# Altium PCB Synthesizer.PcbDoc (part 1 of 2)
Units mm, origin at the board's own origin, x right, y up, seen from the top; angles counter-clockwise.
Board outline 62.91 x 80 mm, 4 copper layers (Top, GND, Power, Bottom), stack 1.782 mm thick; 89 components, 58 nets, 323 pads, 295 vias.
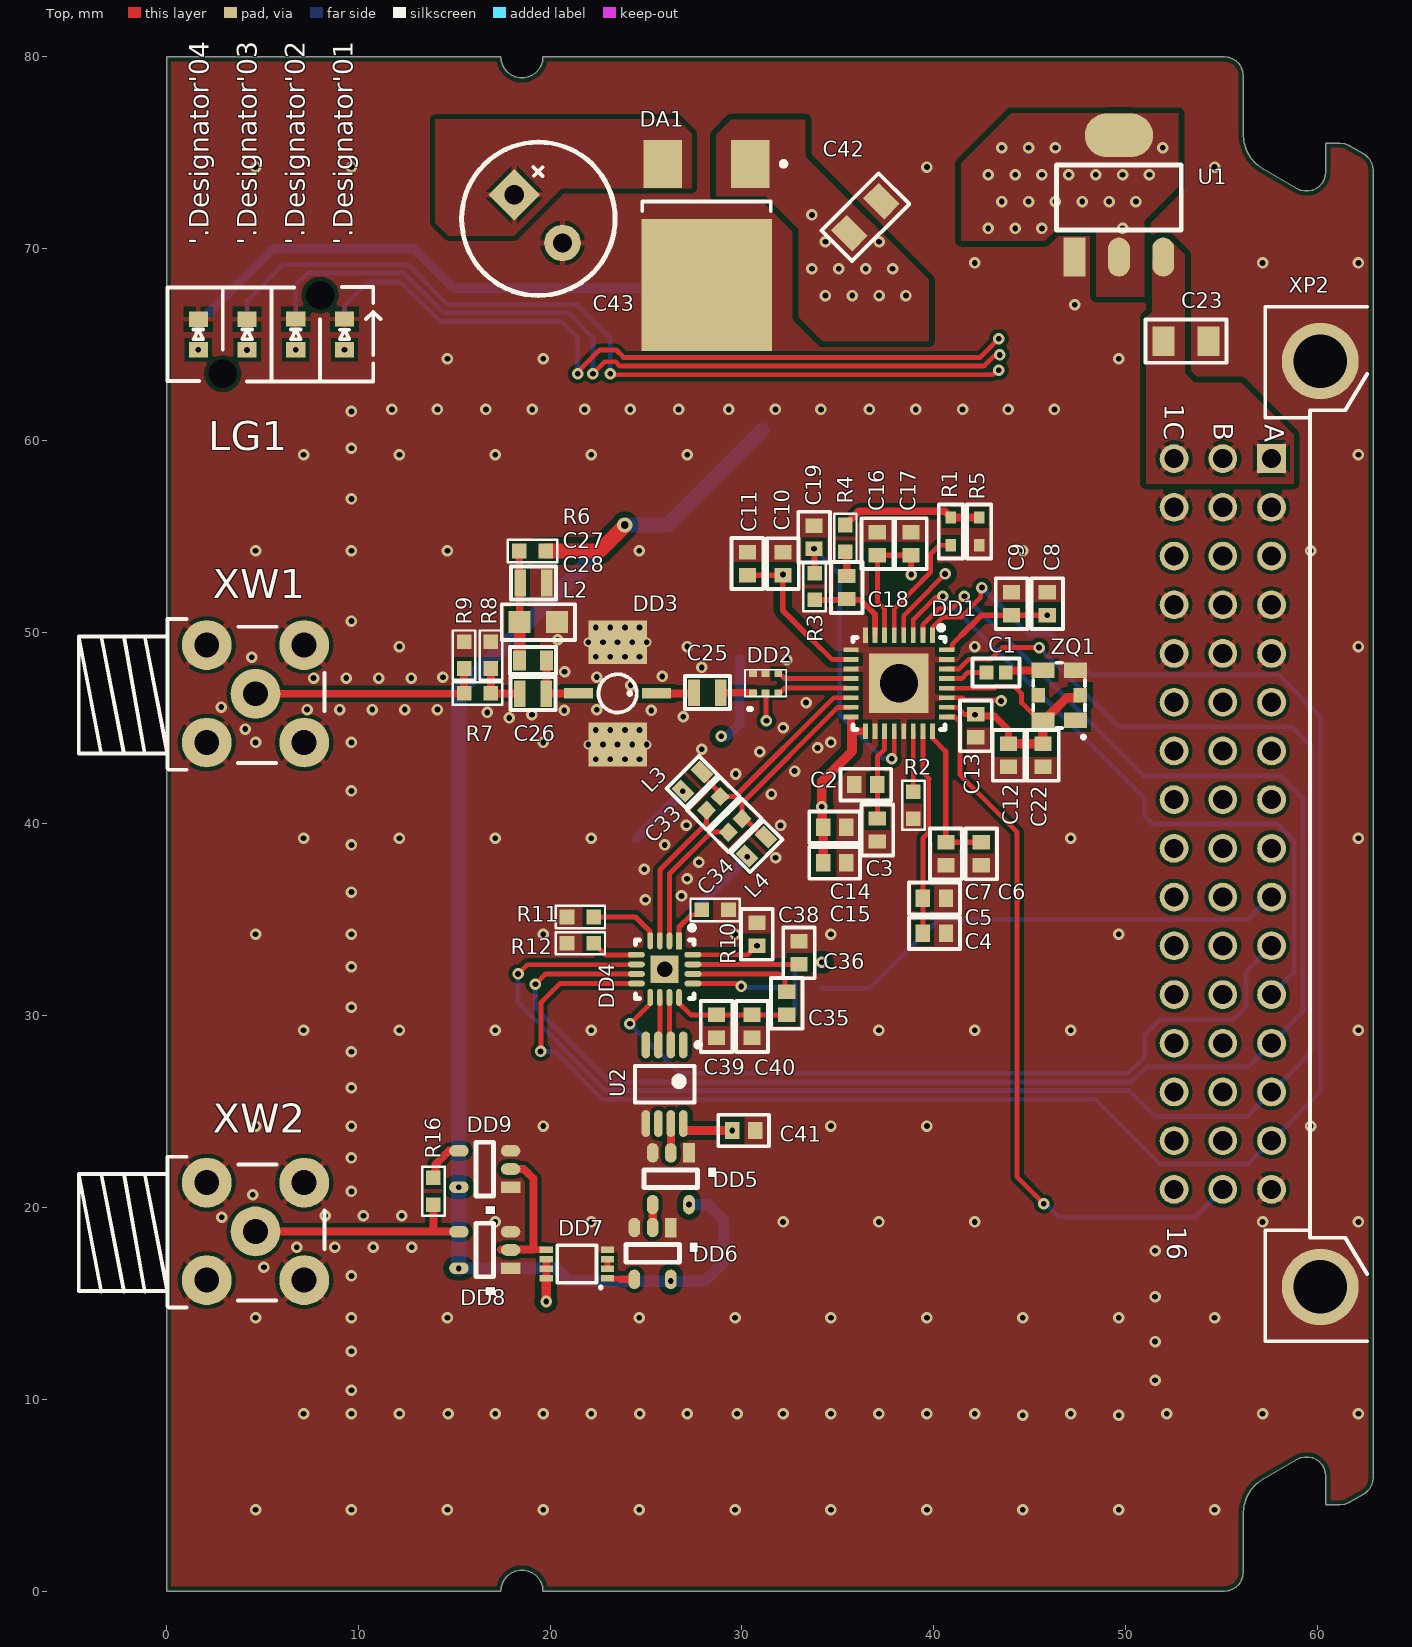
[diagram p0: Top view]
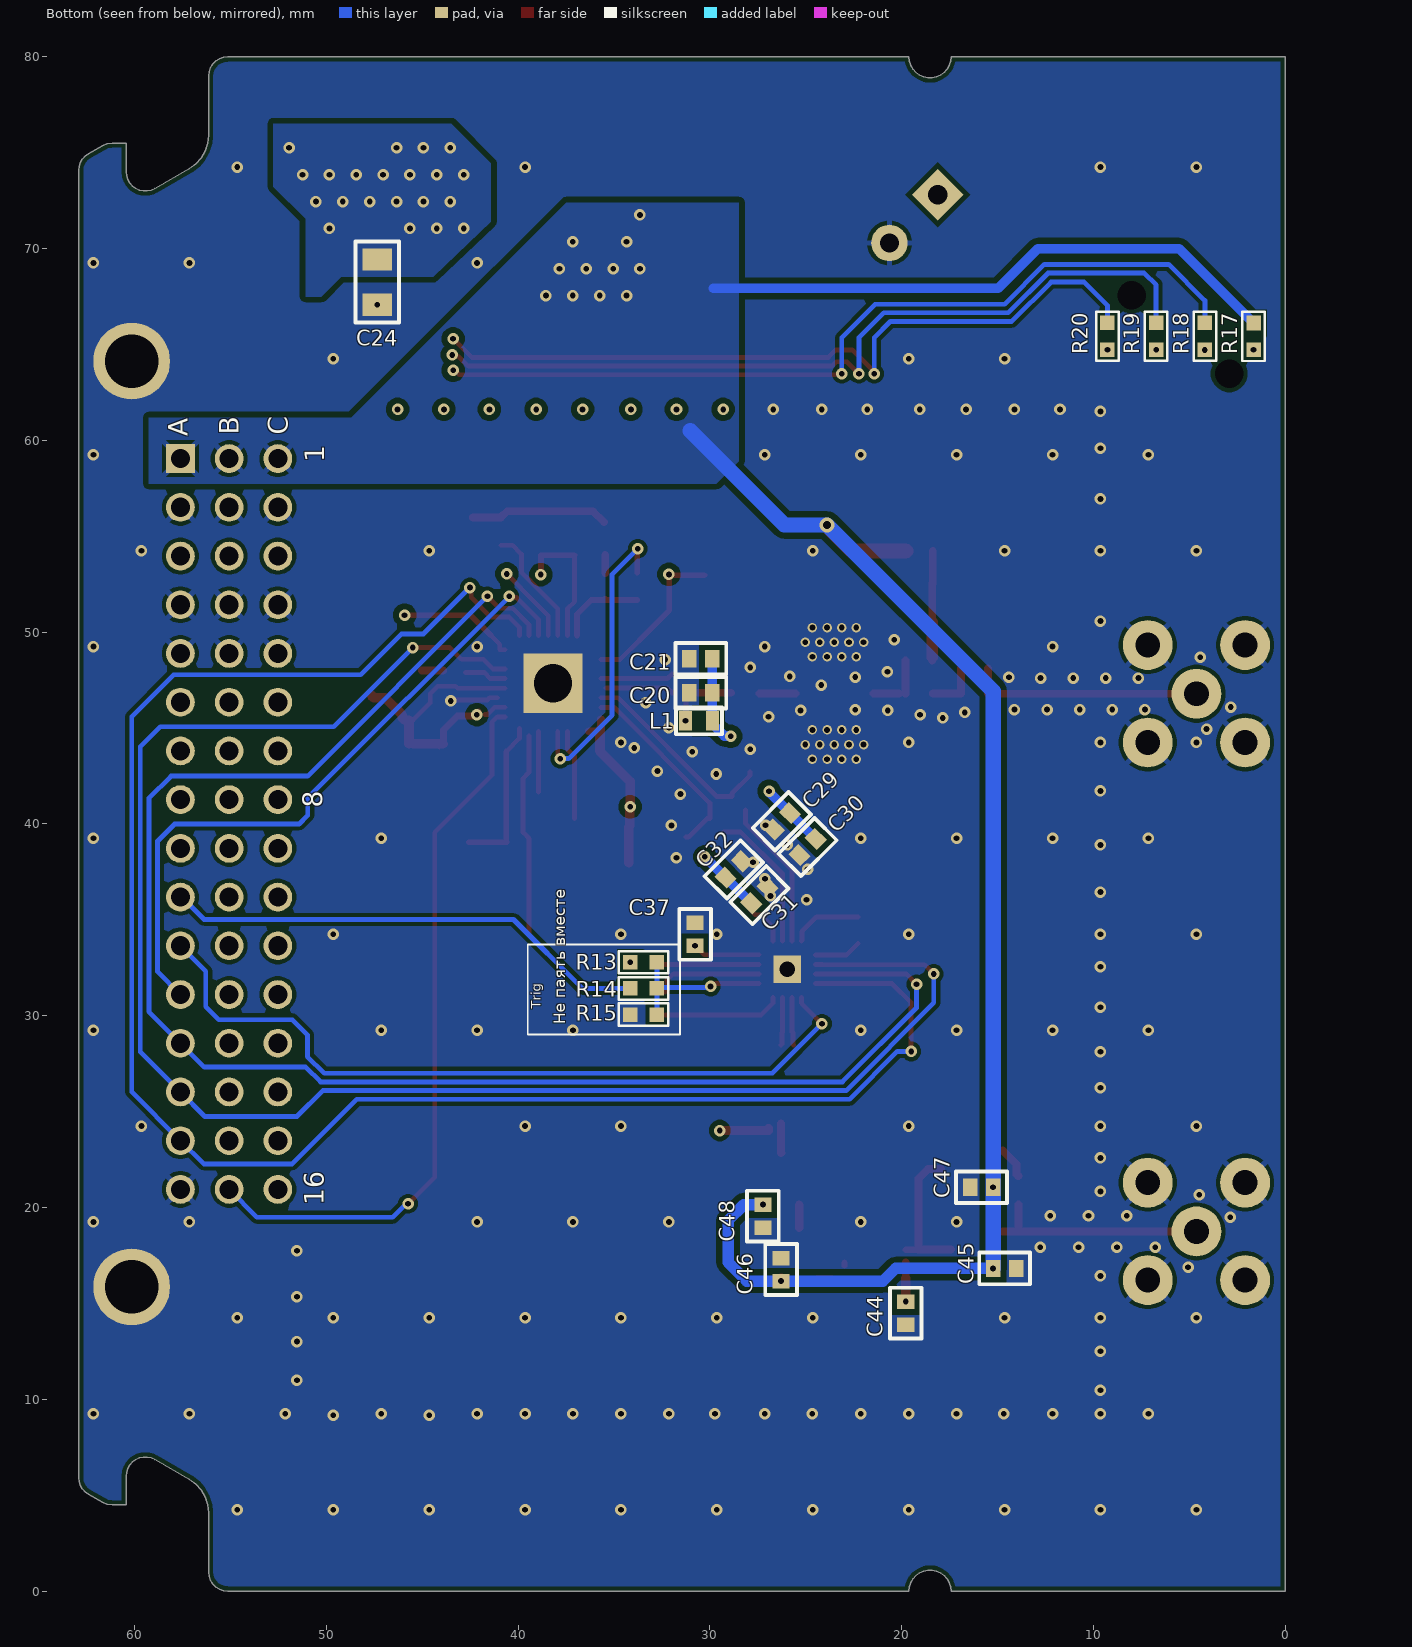
[diagram p1: Bottom view, seen from below]
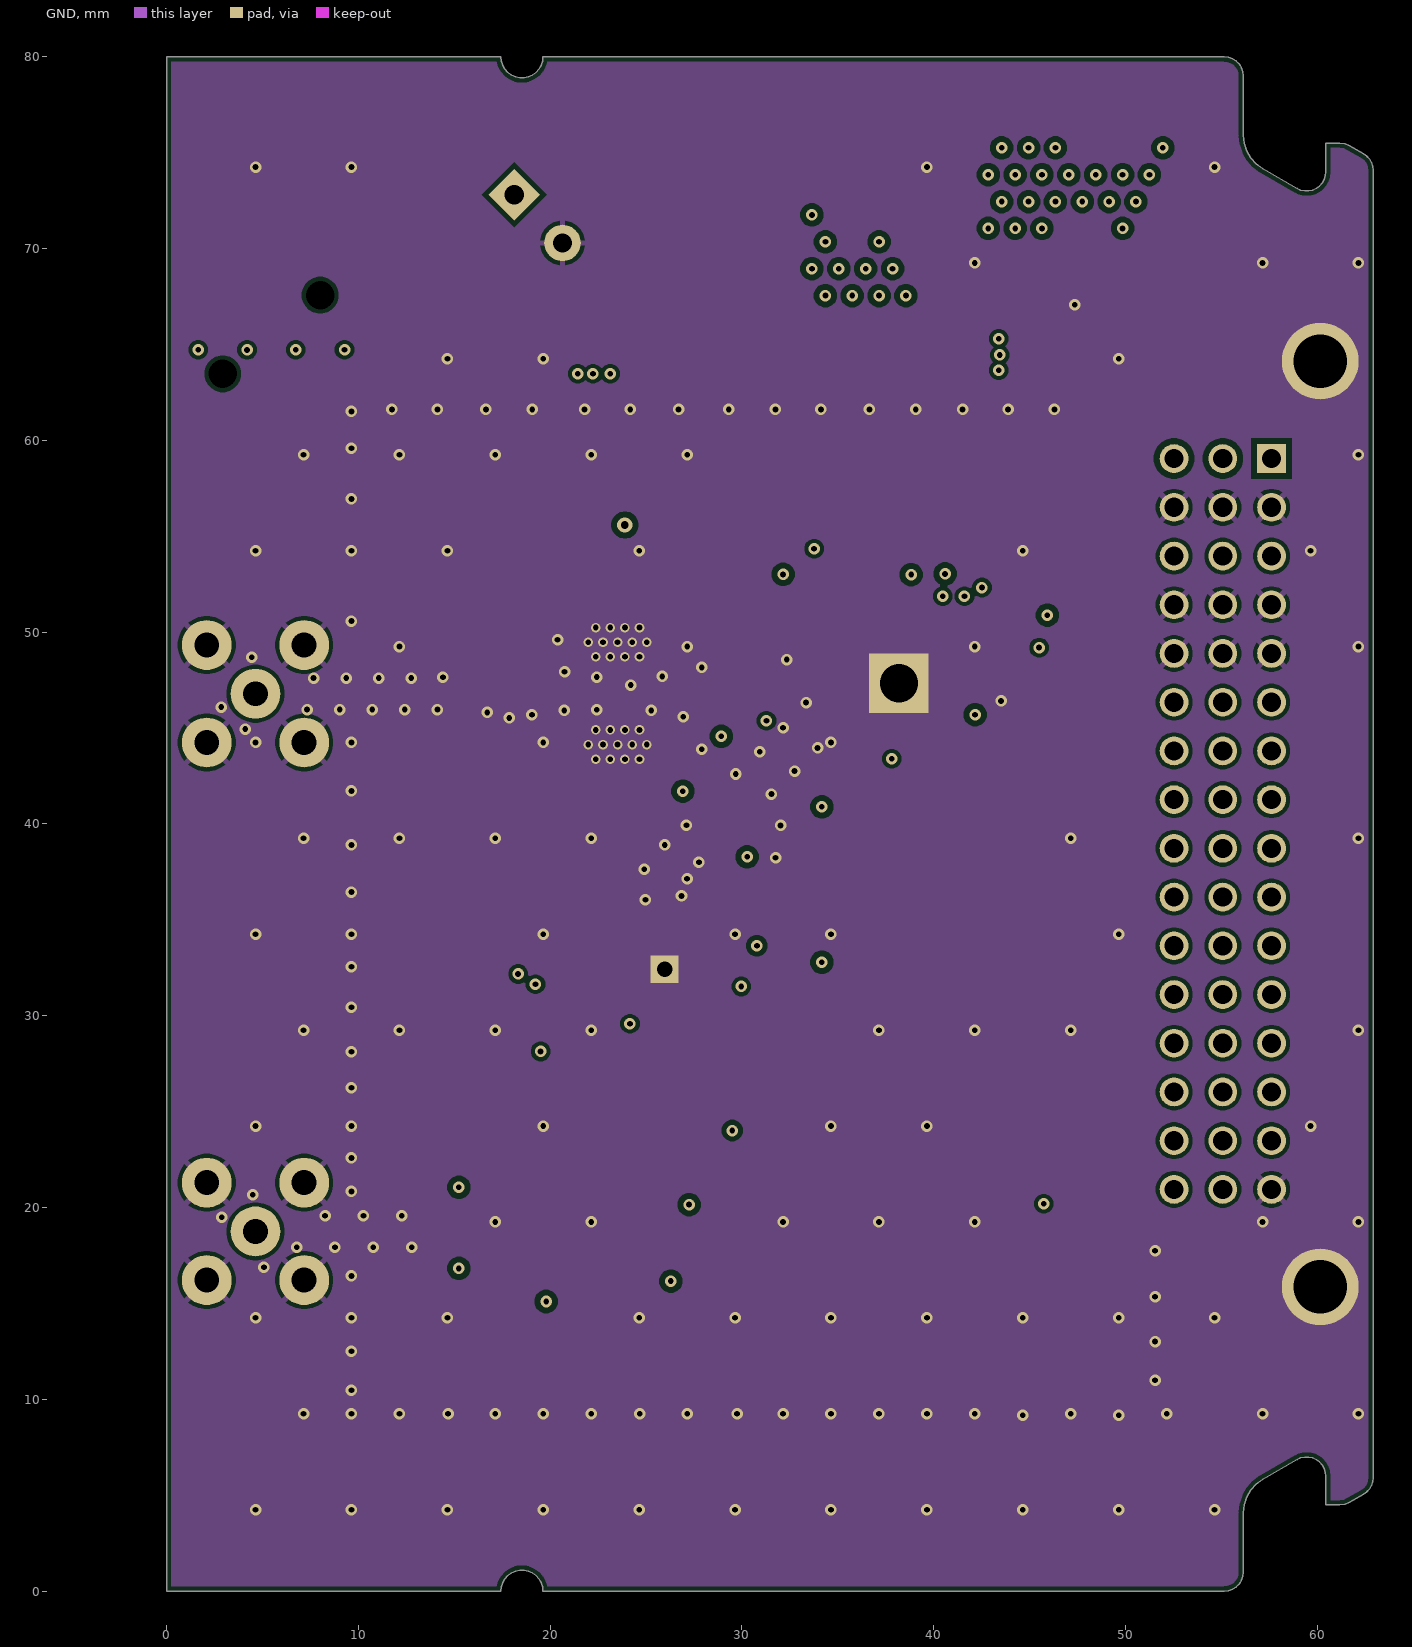
[diagram p2: GND]
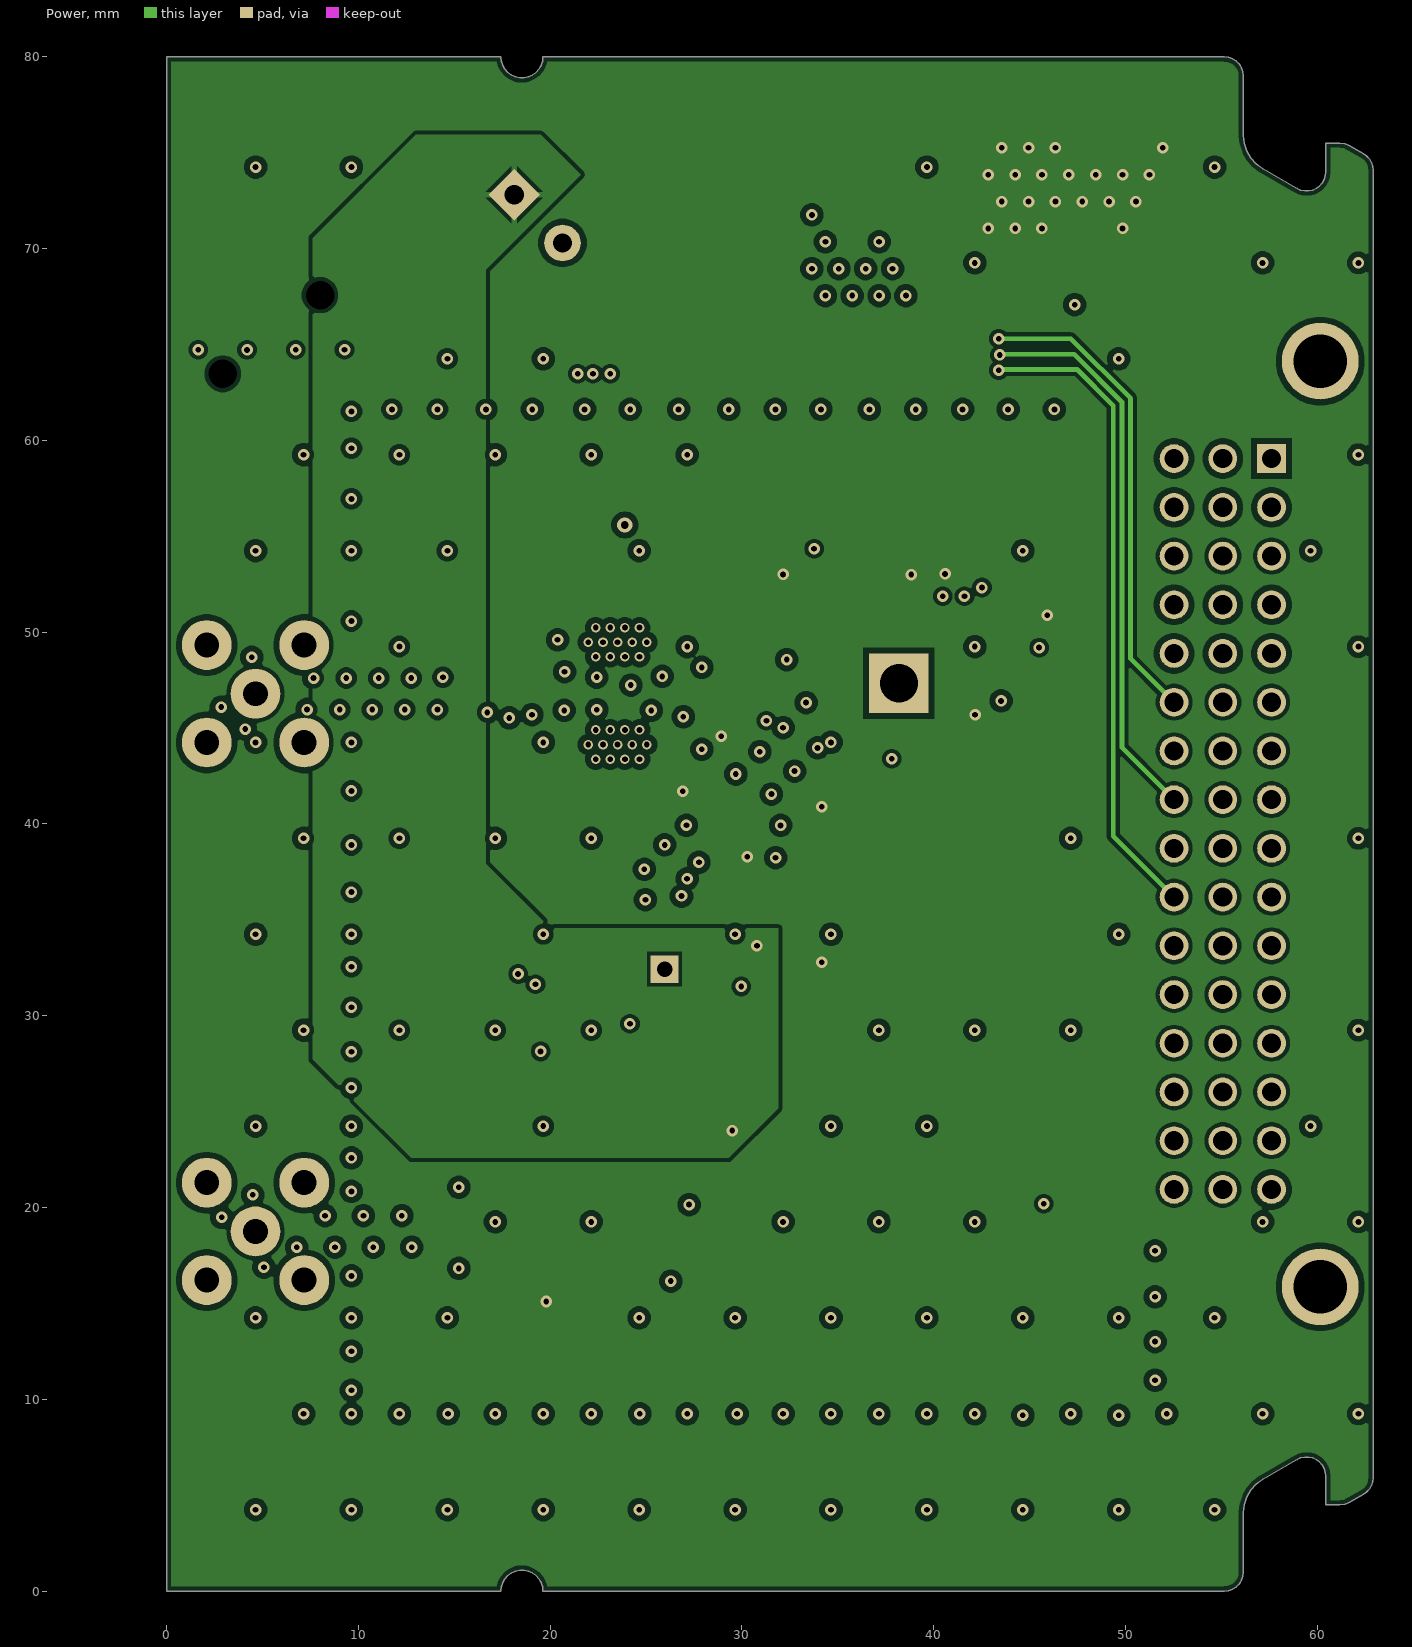
[diagram p3: Power]

## Layer stack, top to bottom
Top Solder: solder mask 0.0102, Solder Resist, Dk 3.5
Top: signal copper 0.035
Dielectric 1: prepreg 0.0711, PP-006, Dk 4.1
GND: signal copper 0.035
Dielectric1: core 1.5, FR-4, Dk 4.8
Power: signal copper 0.035
Dielectric 2: prepreg 0.0711, PP-006, Dk 4.1
Bottom: signal copper 0.035
Bottom Solder: solder mask 0.0102, Solder Resist, Dk 3.5

## Board outline
0,0 17.425,0 17.449,0.229 17.52,0.447 17.635,0.647 17.789,0.817 17.975,0.953 18.185,1.046 18.41,1.094 18.64,1.094 18.865,1.046 19.075,0.953 19.261,0.817 19.415,0.647 19.53,0.447 19.601,0.229 19.625,0 55.139,0 55.361,0.025 55.573,0.099 55.762,0.218 55.921,0.376 56.04,0.566 56.114,0.777 56.139,1 56.139,4.096 56.182,4.512 56.312,4.909 56.521,5.271 56.8,5.582 57.139,5.828 58.937,6.866 59.128,6.951 59.332,6.995 59.541,6.995 59.746,6.951 59.937,6.866 60.106,6.743 60.246,6.588 60.35,6.407 60.415,6.208 60.437,6 60.437,4.5 61.169,4.5 61.428,4.534 61.669,4.634 62.407,5.06 62.576,5.183 62.716,5.338 62.82,5.519 62.885,5.718 62.907,5.926 62.907,74.074 62.885,74.282 62.82,74.481 62.716,74.662 62.576,74.817 62.407,74.94 61.669,75.366 61.428,75.466 61.169,75.5 60.437,75.5 60.437,74 60.415,73.792 60.35,73.593 60.246,73.412 60.106,73.257 59.937,73.134 59.746,73.049 59.541,73.005 59.332,73.005 59.128,73.049 58.937,73.134 57.139,74.172 56.8,74.418 56.521,74.729 56.312,75.091 56.182,75.488 56.139,75.904 56.139,79 56.114,79.223 56.04,79.434 55.921,79.624 55.762,79.782 55.573,79.901 55.361,79.975 55.139,80 19.625,80 19.601,79.771 19.53,79.553 19.415,79.353 19.261,79.183 19.075,79.047 18.865,78.954 18.64,78.906 18.41,78.906 18.185,78.954 17.975,79.047 17.789,79.183 17.635,79.353 17.52,79.553 17.449,79.771 17.425,80 0,80

## Design rules (kind name [scope] priority, off if disabled: settings)
AcuteAngle [All] p1: minimum=3.50000000000000E+0001 checktracksonly=FALSE
BoardOutlineClearance "BoardOutlineClearance 1" [All] p1: gap=0.25 ignorepadtopadclearanceinfootprint=FALSE except(0: Arc-SplitContinuation Track-SplitContinuation SMDPad-SplitContinuation THPad-SplitContinuation Via-SplitContinuation Fill-SplitContinuation Poly-SplitContinuation Region-SplitContinuation Text-SplitContinuation) // Milling
BoardOutlineClearance "BoardOutlineClearance 2" [All] p2: gap=0.4 ignorepadtopadclearanceinfootprint=FALSE except(0: Arc-SplitContinuation Track-SplitContinuation SMDPad-SplitContinuation THPad-SplitContinuation Via-SplitContinuation Fill-SplitContinuation Poly-SplitContinuation Region-SplitContinuation Text-SplitContinuation) // V-Cut
Clearance [(InNamedUnion('Unions') AND InNet('+3.3V')) vs (InNamedUnion('Unions') AND InNet('GND'))] p1: gap=0.2 ignorepadtopadclearanceinfootprint=TRUE
Clearance Clearance_HMC988LP3E [InComponent('DD4')Or InComponent('DD7')] p2: gap=0.17 ignorepadtopadclearanceinfootprint=TRUE
Clearance "Clearance GND and 33v in DD1" [InNet('+3.3V') AND OnLayer('Top') And InComponent('DD1') vs (InNamedPolygon('Top-GND')or InNet('GND'))  AND OnLayer('Top')] p3: gap=0.2 ignorepadtopadclearanceinfootprint=TRUE
Clearance Clearance_3_3V [InNet('+3.3V') vs InNet('GND')] p4: gap=0.3 ignorepadtopadclearanceinfootprint=TRUE except(0.2: Arc-SMDPad Track-SMDPad SMDPad-SMDPad)
Clearance Clearance_5V_1 [InNet('+5V') vs InNet('GND')] p5: gap=0.25 ignorepadtopadclearanceinfootprint=TRUE
Clearance Clearance_6V [InNet('+6V')] p6: gap=0.3 ignorepadtopadclearanceinfootprint=TRUE
Clearance "Clearance-1 1 Oz 35mkm" [All] p7 off: gap=0.2 ignorepadtopadclearanceinfootprint=TRUE // Standart
Clearance "Clearance-1 1/2 Oz 18mkm" [All] p8: gap=0.2 ignorepadtopadclearanceinfootprint=TRUE // Standart
DiffPairsRouting "DiffPairsRouting 1 Oz 35mkm" [All] p1 off: maxlimit=0.254 minlimit=0.23 mostfreqgap=0.23 toplayer_minwidth=0.26 toplayer_maxwidth=0.26 toplayer_prefwidth=0.26 midlayer1_minwidth=0.26 midlayer1_maxwidth=0.26 midlayer1_prefwidth=0.26 midlayer2_minwidth=0.26 midlayer2_maxwidth=0.26 midlayer2_prefwidth=0.26 bottomlayer_minwidth=0.26 bottomlayer_maxwidth=0.26 bottomlayer_prefwidth=0.26 maxuncoupledlength=12.7
DiffPairsRouting "DiffPairsRouting 1/2 Oz 18mkm" [All] p2: maxlimit=0.254 minlimit=0.125 mostfreqgap=0.254 toplayer_minwidth=0.125 toplayer_maxwidth=0.381 toplayer_prefwidth=0.381 midlayer1_minwidth=0.125 midlayer1_maxwidth=0.381 midlayer1_prefwidth=0.381 midlayer2_minwidth=0.125 midlayer2_maxwidth=0.381 midlayer2_prefwidth=0.381 bottomlayer_minwidth=0.125 bottomlayer_maxwidth=0.381 bottomlayer_prefwidth=0.381 maxuncoupledlength=12.7 // Standart
HoleSize "Minimum HoleSize" [IsPad] p1: absolutevalues=TRUE maxlimit=5.9 minlimit=0.6 maxpercent=80.000 minpercent=20.000
HoleSize "Minimum HoleSize VIA 1" [IsVia] p2: absolutevalues=TRUE maxlimit=5.9 minlimit=0.3 maxpercent=80.000 minpercent=20.000 // Standart
HoleSize "Minimum HoleSize VIA 2" [IsVia] p3 off: absolutevalues=TRUE maxlimit=5.9 minlimit=0.2 maxpercent=80.000 minpercent=20.000 // Advance
HoleToHoleClearance Hole2HoleClearance [All] p1: gap=0.25 allowstackedmicrovias=FALSE
MinimumAnnularRing "Minimum AR VIA Standart" [IsVia] p1: minimumring=0.15
MinimumAnnularRing "Minimum AR PAD Standart" [IsPAD] p2: minimumring=0.2
MinimumAnnularRing "Minimum AR VIA Advance" [IsVia] p3 off: minimumring=0.1
MinimumAnnularRing "Minimum AR PAD Advance" [IsPAD] p4 off: minimumring=0.15
MinimumSolderMaskSliver "SolderMask Bridge Standart" [All] p1: minsoldermaskwidth=0.14 // All Masks
MinimumSolderMaskSliver "SolderMask Bridge Advance" [All] p2 off: minsoldermaskwidth=0.1 // Mask LDI
PlaneClearance "PlaneClearance 1 Oz 35mkm" [All] p1 off: clearance=0.2
PlaneClearance "PlaneClearance-1 1/2 Oz 18mkm" [All] p2: clearance=0.2 // Standart
PlaneClearance "PlaneClearance-2 1/2 Oz 18mkm" [All] p3 off: clearance=0.15 // Advance
PlaneConnect "TermalConnect-1 1 Oz 35mkm" [All] p1 off: planeconnectstyle=Relief reliefexpansion=0.2 reliefentries=4 reliefconductorwidth=0.2 reliefairgap=0.2 // Standart
PlaneConnect "TermalConnect-2 1 Oz 35mkm" [All] p2 off: planeconnectstyle=Direct reliefexpansion=0.15 reliefentries=4 reliefconductorwidth=0.2 reliefairgap=0.2 // Advance
PlaneConnect "TermalConnect-1 1/2 Oz 18mkm" [All] p3: planeconnectstyle=Relief reliefexpansion=0.2 reliefentries=4 reliefconductorwidth=0.2 reliefairgap=0.2 // Standart
PlaneConnect "TermalConnect-2 1/2 Oz 18mkm" [All] p4 off: pad.planeconnectstyle=Relief pad.reliefexpansion=0.15 pad.reliefentries=4 pad.reliefconductorwidth=0.15 pad.reliefairgap=0.15 via.planeconnectstyle=Direct via.reliefexpansion=0.15 via.reliefentries=4 via.reliefconductorwidth=0.15 via.reliefairgap=0.15 // Advance
PolygonConnect "Schematic Polygon Connect Style" [InComponent('LG1')] p1: connectstyle=Relief reliefconductorwidth=0.25 reliefentries=4 polygonreliefangle="90 Angle" airgapwidth=0.25
PolygonConnect "PolygonConnect-1 1 Oz 35mkm" [InComponent('DD4')] p2 off: connectstyle=Direct reliefconductorwidth=0.3 reliefentries=4 polygonreliefangle="45 Angle" airgapwidth=0.2 // Standart
PolygonConnect "PolygonConnect-1 1/2 Oz 18mkm_1" [InComponent('DD4')] p3: connectstyle=Direct reliefconductorwidth=0.3 reliefentries=4 polygonreliefangle="45 Angle" airgapwidth=0.2 // Standart
PolygonConnect "PolygonConnect-1 1/2 Oz 18mkm" [All] p4: thpad.connectstyle=Relief thpad.reliefconductorwidth=0.3 thpad.reliefentries=4 thpad.polygonreliefangle="45 Angle" thpad.airgapwidth=0.2 smdpad.connectstyle=Direct smdpad.reliefconductorwidth=0.3 smdpad.reliefentries=4 smdpad.polygonreliefangle="45 Angle" smdpad.airgapwidth=0.2 via.connectstyle=Direct via.reliefconductorwidth=0.3 via.reliefentries=4 via.polygonreliefangle="45 Angle" via.airgapwidth=0.2 // Standart
RoomDefinition Synthesizer [InComponentClass('Synthesizer')] p1: confinementstyle=ConfineIn formatcopy=TRUE lockcomponents=FALSE outline -920.36,-680.748 -869.56,-680.748 -869.56,-655.348 -920.36,-655.348
RoutingCorners [All] p1 off: cornerstyle=45-Degree minsetback=2.54 maxsetback=2.54
RoutingVias [All] p1: holewidth=0.3 width=0.6 viastyle="Through Hole" minholewidth=0.2 minwidth=0.4 maxholewidth=5.9 maxwidth=6.4
SilkToSilkClearance Silk2SilkClearance [All] p1 off: silktosilkclearance=0.15
SilkToSolderMaskClearance Silk2SolderMaskClearance [IsPad] p1 off: minsilkscreentomaskgap=0.15 clearancetoexposedcopper=TRUE
SolderMaskExpansion SolderMaskExpansion_3 [IsVia] p1: expansion=0.102 istentingtop=TRUE
SolderMaskExpansion [InPadClass('All Pads')] p2: expansion=0.102 istentingtop=FALSE
Width "Width 1 Oz 35mkm" [All] p1 off: maxlimit=10 minlimit=0.15 preferedwidth=0.2 checkconnectedcopper=TRUE // Standart
Width "Width 1/2 Oz 18mkm" [All] p2: maxlimit=10 minlimit=0.1 preferedwidth=0.125 checkconnectedcopper=TRUE // Standart
21 further rules are at their usual default settings.

## Classes and differential pairs
net class 50_Om: DIV_N DIV_P NetDD4_13 NetDD5_2 NetDD5_4 NetDD6_4 NetDD7_5 NetDD8_4 NetR7_2 RFOutA_N RFOutA_P RFOutB_N RFOutB_P SYNC
differential pair RFOutB: +RFOutB_P -RFOutB_N
differential pair RFOutB1: +RFOutB1_P -RFOutB1_N
differential pair DIV: +DIV_P -DIV_N
differential pair RFOutA: +RFOutA_P -RFOutA_N

## Components (designator, comment, footprint, x,y, rotation, side; value= is the part's Value field where it differs from the comment)
C1 "Capacitors" "SMD 0402 (1005) max" 43.25,47.9 r180 top value=100pF
C2 "Capacitors" "SMD 0603 (1608) min" 36.458,42.055 r180 top value=0.1uF
C3 "Capacitors" "SMD 0603 (1608) min" 37.058,39.685 r270 top value=10pF
C4 "Capacitors" "SMD 0603 (1608) min" 40.033,34.303 r0 top value=0.1uF
C5 "Capacitors" "SMD 0603 (1608) min" 40.033,36.124 r0 top value=10pF
C6 "Capacitors" "SMD 0603 (1608) min" 40.633,38.443 r270 top value=0.1uF
C7 "Capacitors" "SMD 0603 (1608) min" 42.477,38.443 r270 top value=10pF
C8 "Capacitors" "SMD 0603 (1608) min" 45.919,51.488 r90 top value=0.1uF
C9 "Capacitors" "SMD 0603 (1608) min" 44.053,51.488 r270 top value=10pF
C10 "Capacitors" "SMD 0603 (1608) min" 32.134,53.576 r90 top value=0.1uF
C11 "Capacitors" "SMD 0603 (1608) min" 30.281,53.577 r270 top value=10pF
C12 "Capacitors" "SMD 0603 (1608) min" 43.895,43.582 r270 top value=0.1uF
C13 "Capacitors" "SMD 0603 (1608) min" 42.193,45.115 r90 top value=10pF
C14 "Capacitors" "SMD 0603 (1608) min" 34.832,39.827 r0 top value=0.1uF
C15 "Capacitors" "SMD 0603 (1608) min" 34.832,37.974 r180 top value=10pF
C16 "Capacitors" "SMD 0603 (1608) min" 37.058,54.613 r90 top value=0.1uF
C17 "Capacitors" "SMD 0603 (1608) min" 38.808,54.613 r270 top value=10pF
C18 "Capacitors" "SMD 0603 (1608) min" 35.461,52.331 r90 top value=39nF
C19 "Capacitors" "SMD 0603 (1608) min" 33.759,54.955 r270 top value=1200pF
C20 "Capacitors" "SMD 0603 (1608) min" 30.473,46.843 r0 bottom value=0.1uF
C21 "Capacitors" "SMD 0603 (1608) min" 30.473,48.62 r180 bottom value=10nF
C22 "Capacitors" "SMD 0603 (1608) min" 45.687,43.582 r90 top value=0.1uF
C23 "VJ0805Y104KXBTW1BC" "0805 (2012)" 53.145,65.174 r180 top value=100nF
C24 "VJ0805V106ZXQTW1BC" "0805 (2012)" 47.342,68.252 r90 bottom value=10uF
C25 "100A101JT150XT" "1414 (Min1)" 28.198,46.843 r180 top value=100pF
C26 "100A101JT150XT" "1414 (Min1)" 19.107,46.79 r180 top value=100pF
C27 "100A101JT150XT" "1414 (Min1)" 19.131,52.573 r0 top value=20nF
C28 "VJ0603Y104KXAAC" "0603 (1608)" 19.385,50.524 r0 top value=100pF
C29 "Capacitors" "SMD 0603 (1608) min" 26.25,40.143 r315 bottom value=0.1uF
C30 "Capacitors" "SMD 0603 (1608) min" 24.909,38.801 r135 bottom value=10nF
C31 "Capacitors" "SMD 0603 (1608) min" 27.42,36.29 r315 bottom value=10nF
C32 "Capacitors" "SMD 0603 (1608) min" 28.761,37.632 r135 bottom value=0.1uF
C33 "Capacitors" "SMD 0402 (1005) max" 28.506,41.078 r225 top value=100pF
C34 "Capacitors" "SMD 0402 (1005) max" 29.649,39.926 r225 top value=100pF
C35 "Capacitors" "SMD 0603 (1608) min" 32.332,30.646 r90 top value=1uF
C36 "Capacitors" "SMD 0603 (1608) min" 32.972,33.282 r90 top value=0.01uF
C37 "Capacitors" "SMD 0603 (1608) min" 30.778,34.25 r270 bottom value=0.1uF
C38 "Capacitors" "SMD 0603 (1608) min" 30.778,34.25 r270 top value=10pF
C39 "Capacitors" "SMD 0603 (1608) min" 28.672,29.446 r90 top value=0.1uF
C40 "Capacitors" "SMD 0603 (1608) min" 30.526,29.446 r90 top value=10pF
C41 "Capacitors" "SMD 0603 (1608) min" 30.086,24.02 r180 top value=0.1uF
C42 "VJ0805Y104KXBTW1BC" "0805 (2012)" 36.433,71.639 r225 top value=100nF
C43 "Capacitor Polarized" "Electrolytic D=8mm H=11.5mm" 19.385,71.549 r315 top value="10uF 25V"
C44 "Capacitors" "SMD 0603 (1608) min" 19.789,14.5 r270 bottom value=0.1uF
C45 "Capacitors" "SMD 0603 (1608) min" 14.638,16.827 r180 bottom value=0.1uF
C46 "Capacitors" "SMD 0603 (1608) min" 26.29,16.77 r90 bottom value=0.1uF
C47 "Capacitors" "SMD 0603 (1608) min" 15.838,21.06 r0 bottom value=0.1uF
C48 "Capacitors" "SMD 0603 (1608) min" 27.24,19.556 r270 bottom value=0.1uF
DA1 "LF50ABDT-TR" DPAK228P970X238-3N 28.153,69.999 r270 top
DD1 "ADF4351BCPZ" "LFCSP-32  Long Pin - with VIA" 38.183,47.332 r270 top
DD2 "BD1631J50100AHF" 0805_a 31.233,47.346 r180 top
DD3 "AG303-86G" "SOT-86 (Min)" 23.513,46.809 r180 top
DD4 "HMC988LP3E" "QFN16M.5 Long Pin" 25.966,32.432 r270 top
DD5 "SN74AHCT1G125DBVR" SOT-23-5 26.29,21.506 r180 top
DD6 "SN74AHCT1G125DBVR" SOT-23-5 25.34,17.612 r180 top
DD7 "74AUP1G74" SOT765-1 22.789,16.31 r180 top
DD8 "SN74AHCT1G125DBVR" SOT-23-5 16.588,17.791 r90 top
DD9 "SN74AHCT1G125DBVR" SOT-23-5 16.588,22.01 r90 top
L1 "0603HP-18NXJE" 0603HP 30.573,45.382 r180 bottom
L2 "0603HP-18NXJE" 0603HP 19.107,48.524 r180 top
L3 "0603HP-18NXJE" 0603HP 27.41,42.206 r225 top
L4 "0603HP-18NXJE" 0603HP 30.765,38.829 r225 top
LG1 "1296.1004" 1296.1004 5.468,65.522 r270 top value="APT1608ZGCK, APT1608ZGCK, APT1608ZGCK, APT1608ZGCK"
R1 "Resistor" "Resistor SMD 0603 (1608) min" 40.894,55.254 r270 top value=1R
R2 "4K7" 0603R-4K7 38.933,40.277 r90 top
R3 "680" 0603R-4K7 33.785,51.682 r90 top
R4 "120" 0603R-4K7 35.385,54.193 r90 top
R5 "Resistor" "Resistor SMD 0603 (1608) min" 42.362,55.254 r270 top value=360
R6 "51R" 0603R-100 18.381,54.232 r0 top
R7 "100R" 0603R-100 16.909,46.809 r180 top
R8 "100R" 0603R-100 16.909,49.505 r270 top
R9 "100R" 0603R-100 15.512,48.108 r90 top
R10 "10k" 0603R-0R 29.296,35.523 r180 top
R11 "10k" 0603R-0R 20.877,35.154 r0 top
R12 "10k" 0603R-0R 20.877,33.782 r0 top
R13 "X" 0603R-0R 32.764,32.793 r0 bottom
R14 "0" 0603R-0R 32.764,31.432 r0 bottom
R15 "X" 0603R-0R 34.161,30.062 r180 bottom
R16 "5R" 0603R-0R 13.912,21.553 r270 top
R17 "10k" 0603R-0R 1.658,64.721 r90 bottom
R18 "0" 0603R-0R 4.198,64.726 r90 bottom
R19 "0" 0603R-0R 6.738,64.726 r90 bottom
R20 "0" 0603R-0R 9.278,64.726 r90 bottom
U1 "LD1117S33TR" SOT-223 49.652,72.73 r0 top
U2 "SN65ELT21D" DGK8_L 25.965,26.433 r270 top
XP2 "09 23 148 6921" "09 23 148 6921" 56.337,40 r270 top locked
XW1 "J01151A0201" J01151A0201 4.635,46.79 r90 top
XW2 "J01151A0201" J01151A0201 4.635,18.76 r90 top
ZQ1 "ГК1010-TK" DIL-8 46.537,46.707 r90 top

## Footprints (in the part's own frame and the unit in brackets; to place one, negate y for a bottom-side part, rotate by r counter-clockwise, add the part's x,y. Pads: shape width x height; smd on the part's side, far side on the other; paste and mask are expansions set on the pad)
"09 23 148 6921" [mm]
  rect 1.5x1.5 hole 1: a1(-19.05,1.27)
  round 1.5 hole 1: a2(-16.51,1.27) a3(-13.97,1.27) a4(-11.43,1.27) a5(-8.89,1.27) a6(-6.35,1.27) a7(-3.81,1.27) a8(-1.27,1.27) a9(1.27,1.27) a10(3.81,1.27) a11(6.35,1.27) a12(8.89,1.27) a13(11.43,1.27) a14(13.97,1.27) a15(16.51,1.27) a16(19.05,1.27) b1(-19.05,-1.27) b2(-16.51,-1.27) b3(-13.97,-1.27) b4(-11.43,-1.27) b5(-8.89,-1.27) b6(-6.35,-1.27) b7(-3.81,-1.27) b8(-1.27,-1.27) b9(1.27,-1.27) b10(3.81,-1.27) b11(6.35,-1.27) b12(8.89,-1.27) b13(11.43,-1.27) b14(13.97,-1.27) b15(16.51,-1.27) b16(19.05,-1.27) c1(-19.05,-3.81) c2(-16.51,-3.81) c3(-13.97,-3.81) c4(-11.43,-3.81) c5(-8.89,-3.81) c6(-6.35,-3.81) c7(-3.81,-3.81) c8(-1.27,-3.81) c9(1.27,-3.81) c10(3.81,-3.81) c11(6.35,-3.81) c12(8.89,-3.81) c13(11.43,-3.81) c14(13.97,-3.81) c15(16.51,-3.81) c16(19.05,-3.81)
  round 4 hole 2.8: MH(-24.13,3.81) MH(24.13,3.81)
  silkscreen extent -26.97,0.94 26.97,6.25, body extent -27.02,-4.1 26.98,13.92, height 9.45
"0603 (1608)" [mm]
  rect 1.15x1.15 smd: 1(-0.98,0) 2(0.98,0)
  silkscreen extent -1.91,-0.93 1.91,0.93, body extent -0.8,-0.4 0.8,0.4, height 0.5
0603HP [mm]
  rect 0.69x1.02 smd: 1(-0.7,0) 2(0.7,0)
  silkscreen extent -1.2,-0.7 1.2,0.7, body extent -0.87,-0.54 0.88,0.55, height 0.93
0603R-0R [mil] "RESISTOR 0603"
  rect 30x30 smd: 1(0,0) 2(55,0)
  silkscreen extent -23,-23 78,23, body extent -4,-15 59,15, height 20
0603R-4K7 [mil] "RESISTOR 0603"
  rect 30x30 smd: 1(0,0) 2(55,0)
  silkscreen extent -23,-23 78,23, body extent -4,-15 59,15, height 20
0603R-100 [mil] "RESISTOR 0603"
  rect 30x30 smd: 1(0,0) 2(55,0)
  silkscreen extent -23,-23 78,23, body extent -4,-15 59,15, height 20
"0805 (2012)" [mm]
  rect 1.15x1.55 smd: 1(-1.18,0) 2(1.18,0)
  silkscreen extent -2.11,-1.13 2.11,1.13, body extent -0.99,-0.62 1.01,0.62, height 1.3
0805_a [mm]
  rect 0.41x0.33 smd: 1(0.66,0.495) 2(0,0.495) 3(-0.66,0.495) 4(-0.66,-0.495) 5(0,-0.495) 6(0.66,-0.495)
  silkscreen extent -1.07,-0.7 1.07,1.35, body extent -1.02,-0.64 1.02,0.64, height 0.68
1296.1004 [mm] "Miniature 4-fold Display with Spherical Radiating"
  rect 0.8x1 smd: 1(0.804,-3.81) 2(-0.796,-3.81) 3(0.804,-1.27) 4(-0.796,-1.27) 5(0.796,1.27) 6(-0.804,1.27) 7(0.796,3.81) 8(-0.804,3.81)
  round 0 hole 1.5 unplated: MH(-2.05,2.54) MH(2.05,-2.54)
  silkscreen extent -2.48,-5.42 2.45,5.69, body extent -2.45,-10.4 2.45,5.3, height 11.18
"1414 (Min1)" [mm] "High Density"
  rect 0.6x1.4 smd: 1(-0.7,0) 2(0.7,0)
  silkscreen extent -1.17,-0.88 1.18,0.85, body extent -0.7,-0.7 0.7,0.7, height 1.45
DGK8_L [mm] "TSOP, 8-Leads, Body 3x3mm, Pitch 0.65mm, IPC High Density"
  oval 1.4x0.45 smd: 1(-2.05,0.975) 2(-2.05,0.325) 3(-2.05,-0.325) 4(-2.05,-0.975) 5(2.05,-0.975) 6(2.05,-0.325) 7(2.05,0.325) 8(2.05,0.975)
  silkscreen extent -2.17,-1.55 0.95,1.88, body extent -1.55,-1.55 1.55,1.55, height 1.1
DIL-8 [mm]
  rect 0.8x1.2 smd: 1(-1.305,-0.85) 3(1.305,-0.85) 4(1.305,0.85) 6(-1.305,0.85)
  rect 0.75x0.7 smd: 2(0,-1.1) 5(0,1.1)
  silkscreen extent -2.25,-1.35 1.7,1.35, body extent -1.6,-1.25 1.6,1.25, height 1.64
DPAK228P970X238-3N [mm] "D-PAK, 3-Pads, Body 6,20x6,72mm (max), IPC Medium Density"
  rect 2.5x2 smd: 1(-4.4,2.28) 3(-4.4,-2.28)
  rect 6.9x6.8 smd: 2(1.9,0)
  silkscreen extent -4.54,-3.35 -1.95,4.14, body extent -4.85,-3.22 5.09,3.32, height 2.39
"Electrolytic D=8mm H=11.5mm" [mm]
  rect 1.905x1.905 hole 1: 1(-1.778,0)
  round 1.905 hole 1: 2(1.778,0)
  silkscreen extent -4,-4 4,4, body extent -4.25,-4.24 4.21,4.24, height 13
J01151A0201 [mm]
  round 2.6 hole 1.3: 1(0,0) 2(-2.54,-2.54) 2(-2.54,2.54) 2(2.54,-2.54) 2(2.54,2.54)
  silkscreen extent -3.97,-3.59 3.89,9.21, body extent -5.17,-3.5 5.03,35.78, height 10.85
"LFCSP-32  Long Pin - with VIA" [mm]
  rect 0.8x0.25 smd: 1(-2.5,1.75) 2(-2.5,1.25) 3(-2.5,0.75) 4(-2.5,0.25) 5(-2.5,-0.25) 6(-2.5,-0.75) 7(-2.5,-1.25) 8(-2.5,-1.75) 17(2.5,-1.75) 18(2.5,-1.25) 19(2.5,-0.75) 20(2.5,-0.25) 21(2.5,0.25) 22(2.5,0.75) 23(2.5,1.25) 24(2.5,1.75)
  rect 0.25x0.8 smd: 9(-1.75,-2.5) 10(-1.25,-2.5) 11(-0.75,-2.5) 12(-0.25,-2.5) 13(0.25,-2.5) 14(0.75,-2.5) 15(1.25,-2.5) 16(1.75,-2.5) 25(1.75,2.5) 26(1.25,2.5) 27(0.75,2.5) 28(0.25,2.5) 29(-0.25,2.5) 30(-0.75,2.5) 31(-1.25,2.5) 32(-1.75,2.5)
  rect 3.1x3.1 hole 2: 33(0,0)
  silkscreen extent -3.03,-2.4 2.4,2.4, body extent -2.51,-2.51 2.51,2.51, height 0.8
"QFN16M.5 Long Pin" [mm] "Body Size 3x3 mm, Pitch 0.5 mm"
  rect 0.889x0.305 smd: 1(-1.475,0.75)
  oval 0.889x0.305 smd: 2(-1.475,0.25) 3(-1.475,-0.25) 4(-1.475,-0.75) 9(1.475,-0.75) 10(1.475,-0.25) 11(1.475,0.25) 12(1.475,0.75)
  oval 0.305x0.889 smd: 5(-0.75,-1.475) 6(-0.25,-1.475) 7(0.25,-1.475) 8(0.75,-1.475) 13(0.75,1.475) 14(0.25,1.475) 15(-0.25,1.475) 16(-0.75,1.475)
  rect 1.45x1.45 hole 0.8: 17(0,0)
  silkscreen extent -2.29,-1.52 1.52,1.55, body extent -1.5,-1.5 1.5,1.5, height 0.86
"Resistor SMD 0603 (1608) min" [mm]
  rect 0.65x0.55 smd: 1(-0.725,0) 2(0.725,0)
  silkscreen extent -1.41,-0.64 1.41,0.64, body extent -0.8,-0.4 0.8,0.4, height 0.45
"SMD 0402 (1005) max" [mm]
  rect 0.72x0.72 smd: 1(-0.5,0) 2(0.5,0)
  silkscreen extent -1.22,-0.72 1.22,0.72, body extent -0.5,-0.25 0.5,0.25, height 0.5
"SMD 0603 (1608) min" [mm]
  rect 0.75x0.9 smd: 1(-0.6,0) 2(0.6,0)
  silkscreen extent -1.33,-0.82 1.33,0.82, body extent -0.8,-0.4 0.8,0.4, height 0.5
SOT765-1 [mm] "VSSOP8"
  rect 0.7x0.33 smd: 1(-0.2,0) 2(-0.2,-0.5) 3(-0.2,-1) 4(-0.2,-1.5) 5(3,-1.5) 6(3,-1) 7(3,-0.5) 8(3,0)
  silkscreen extent 0.1,-1.73 2.42,0.52, body extent -0.22,-1.8 3.02,0.3, height 1
SOT-23-5 [mil]
  rect 24x40 smd: 1(-37.4,-53.15)
  oval 24x40 smd: 2(0,-53.15) 3(37.4,-53.15) 4(37.4,53.15) 5(-37.4,53.15)
  silkscreen extent -55,-18 55,18, body extent -57,-55 57,55, height 57
"SOT-86 (Min)" [mil] "micro-X"
  rect 60x21.65 smd: 1(-80,0) 3(80,0)
  rect 120x90 smd: 2(0,-105) 4(0,105)
  silkscreen extent -39,-39 39,39, body extent -100,-100 100,100, height 65
SOT-223 [mil]
  rect 45x80 smd: 1(-90.94,-125)
  oval 45x80 smd: 2(0,-125) 3(90.94,-125)
  oval 140x90 smd: 2(0,125)
  silkscreen extent -128,-69 128,64, body extent -128,-140 128,140, height 65

## Part data
C1 C2 C3 C4 C5 C6 C7 C8 C9 C10 C11 C12 C13 C14 C15 C16 C17 C18 C19 C20 C21 C22 C29 C30 C31 C32 C33 C34 C35 C36 C37 C38 C39 C40 C41 C44 C45 C46 C47 C48: "Capacitor", Tolerance=±10%, Category=Конденсаторы
C23 C42: "Ceramic Capacitor  0.1uF 100V", Case/Package=0805, Dielectric=X7R, Dielectric Material=Tantalum, Manufacturer="Vishay Vitramon", Max Operating Temperature=125°C, Min Operating Temperature=-55°C, Supplier Part Number 1=2896560, Tolerance=10%, Voltage Rating (DC)=100V, Category=Конденсаторы, ComponentLink1Description=http://www.vishay.com/docs/28548/vjw1bcbascomseries.pdf, ComponentLink1URL=http://www.vishay.com/docs/28548/vjw1bcbascomseries.pdf, Depth=1.25mm, Lead Free="Lead Free", Length=2mm, Manufacturer Part Number=VJ0805Y104KXBTW1BC, Mount="Surface Mount", Packaging="Tape and Reel", Pricing 1="5=0.0806, 50=0.0509, 250=0.0369, 500=0.0317 (RUB)", Radiation Hardening=No, Stock 1=0, Supplier 1=Farnell, Разработчик="Богатов Алексей"
C24: "Ceramic Capacitors 10uF 10volts", Case/Package=0805, Dielectric=Y5V, Dielectric Material=Tantalum, Manufacturer="Vishay Vitramon", Max Operating Temperature=85°C, Min Operating Temperature=-30°C, Supplier Part Number 1=VJ0805V106ZXQTW1BC-ND, Tolerance=80%, Voltage Rating (DC)=10V, Category=Конденсаторы, ComponentLink1Description=http://www.vishay.com/docs/28548/vjw1bcbascomseries.pdf, ComponentLink1URL=http://www.vishay.com/docs/28548/vjw1bcbascomseries.pdf, Lead Free="Lead Free", Manufacturer Part Number=VJ0805V106ZXQTW1BC, Mount="Surface Mount", Pricing 1="3000=0.1089 (USD)", Stock 1=0, Supplier 1=Digi-Key, Разработчик="Богатов Алексей"
C25 C26 C27: "Multilayer Ceramic Capacitors MLCC", Case Code=1414, Manufacturer="American Technical Ceramics", Max Operating Temperature=125°C, Min Operating Temperature=-55°C, Tolerance=±5%, Voltage Rating (DC)=150V, Category=Конденсаторы, ComponentLink2Description=datasheet, ComponentLink2URL=http://www.atceramics.com/UserFiles/100a.pdf?src-supplier=Digi-Key, ComponentLink3Description="American Technical Ceramic Corp.", ComponentLink3URL=http://www.atceramics.com/Capacitors/3/Multilayer-Capacitors, Manufacturer Part Number=100A101JT150XT, Packaging="Tape and Reel", RoHS=Yes, Termination=SMD/SMT, Разработчик="Леткин Д.С."
C28: "Ceramic Capacitors 0.1uF 50volts", Case/Package=0603, Dielectric=X7R, Manufacturer="Vishay Semiconductors", Max Operating Temperature=150°C, Min Operating Temperature=-55°C, Supplier Part Number 1=720-1848-2-ND, Tolerance=10%, Voltage Rating (DC)=50V, Category=Конденсаторы, Depth=0.8mm, Lead Free="Lead Free", Length=1.6mm, Manufacturer Part Number=VJ0603Y104KXAAC, Mount="Surface Mount", Packaging="Tape and Reel", Pricing 1="4000=0.0861 (USD)", Radiation Hardening=No, Stock 1=180000, Supplier 1=Digi-Key, Разработчик="Богатов Алексей"
C43: Tolerance=±10%, Category=Конденсаторы
DA1: "IC REG LDO 5V 0.5A DPAK", Case/Package=TO-252, Dropout Voltage=400mV, Manufacturer=STMicroelectronics, Max Input Voltage=16V, Min Input Voltage=3V, Nominal Output Voltage=5V, Output Current=500mA, Output Voltage Accuracy=1%, Quiescent Current=1mA, Accuracy=1%, Category=Микросхемы, ComponentLink1Description=Datasheet, ComponentLink1URL=http://www.st.com/content/ccc/resource/technical/document/datasheet/c4/0e/7e/2a/be/bc/4c/bd/CD00000546.pdf/files/CD00000546.pdf/jcr:content/translations/en.CD00000546.pdf, ComponentLink5Description=Digi-Key, ComponentLink5URL=https://www.digikey.ca/product-detail/en/stmicroelectronics/LF50ABDT-TR/497-8344-1-ND/1958549, Manufacturer Part Number=LF50ABDT-TR, Mount="Surface Mount", Output Type=Fixed, Output Voltage=5V, Polarity=Positive, Разработчик="Леткин Д."
DD1: "Phase Locked Loops - PLL WB Synthesizer w/ Intg VCO", Case/Package=LFCSP-32, Frequency=4.4GHz, Manufacturer="Analog Devices", Max Operating Temperature=85°C, Min Operating Temperature=-40°C, Min Supply Voltage=3V, Nominal Supply Current=110mA, Operating Supply Voltage=3.3V, Category=Микросхемы, ComponentLink1Description=datasheet, ComponentLink1URL=https://www.analog.com/media/en/technical-documentation/data-sheets/ADF4351.pdf, ComponentLink2Description=Mouser, ComponentLink2URL=https://ru.mouser.com/ProductDetail/Analog-Devices/ADF4351BCPZ?qs=BpaRKvA4VqFCiUOrGPcIQw%3D%3D, Input=CMOS, Interface=SPI, Manufacturer Part Number=ADF4351BCPZ, Max Frequency=4.4GHz, PLL=Yes, Разработчик="Леткин Д.С."
DD2: "The BD1631J50100AHF is a low profile sub-miniature balanced to unbalanced / transformer designed for differential inputs and output locations on next generation / wireless chipsets in an easy to use surface mount package covering 802.11b+g+n, / GSM, DCS, PCS and UMTS.", Case Code (Imperial)=0805, Frequency="1.6 - 3.1GHz", Manufacturer=Anaren, Max Operating Temperature=85°C, Min Operating Temperature=-55°C, Category=Микросхемы, ComponentLink1Description=datasheet, ComponentLink1URL=https://cdn.anaren.com/product-documents/Xinger/BalunTransformers/BD1631J50100AHF/BD1631J50100AHF_DataSheet(Rev_K).pdf, ComponentLink2Description=Anaren, ComponentLink2URL=https://www.anaren.com/catalog/xinger/subminiature-components, Contact Plating=Gold, Impedance=100R, Insertion Loss=0.6dB, Manufacturer Part Number=BD1631J50100AHF, Number of Pins=6, Разработчик="Леткин Д.С."
DD3: "The AG303-86 is a general-purpose buffer amplifier that / offers high dynamic range in a low-cost surface-mount / package.", Case/Package=SOT-86, Manufacturer=TriQuint, Max Operating Temperature=85°C, Max Supply Voltage=4.5V, Operating Supply Current=35mA, Operating Supply Voltage=4.2V, Test Frequency=900MHz, Category=Микросхемы, ComponentLink1Description=Datasheet, ComponentLink1URL=https://ru.mouser.com/datasheet/2/412/G303-86-1500726.pdf, ComponentLink2Description=Qorvo, ComponentLink2URL=https://www.qorvo.com/products/p/AG303-86G, Gain=20.5dB, Manufacturer Part Number=AG303-86G, Number of Pins=4, Packaging="Tape and Reel", Radiation Hardening=No, Разрабочик="Леткин Д.С."
DD4: "The HMC988LP3E is a an ultra low noise clock / divider capable of dividing by 1/2/4/8/16/32. It is a / versatile device with additional functionality including adjustable output phase, adjustable delay in 60 steps of ~ 20 ps, a clock synchronization function, and a clock invert option.", Case/Package=QFN16, Manufacturer="Analog Devices", Max Frequency=4GHz, Max Operating Temperature=85°C, Min Operating Temperature=-40°C, Operating Supply Voltage=+3.3V, Category=Микросхемы, Manufacturer Part Number=HMC988LP3E, Разработчик="Жабин И."
DD5 DD6 DD8 DD9: "SINGLE BUS BUFFER GATE WITH 3-STATE OUTPUT", Base Part Number=74AHCT1G125, Current - Output High, Low="8mA, 8mA", Manufacturer="Texas Instruments", Operating Temperature="-40°C ~ 125°C (TA)", Package / Case="SC-74A, SOT-753", Supplier Device Package=SOT-23-5, Supplier Part Number 1=296-4708-2-ND, Voltage - Supply="4.5 V ~ 5.5 V", Category=Микросхемы, ComponentLink1Description=Datasheet, ComponentLink1URL=http://www.ti.com/lit/ds/symlink/sn74ahct1g125.pdf, Input Type=-, Logic Type="Buffer, Non-Inverting", Manufacturer Part Number=SN74AHCT1G125DBVR, Mounting Type="Surface Mount", Number of Bits per Element=1, Output Type=Push-Pull, Packaging="Tape & Reel (TR)", Part Status=Active, Pricing 1="3000=0.0918, 6000=0.0867, 15000=0.07905 (USD)", RoHS="RoHS Compliant", Stock 1=30000, Supplier 1=Digi-Key
DD7: "Low-power D-type flip-flop with set and reset; positive-edge / trigger", Case/Package=SOT765-1, Manufacturer="NXP Semiconductors", Max Frequency=315MHz, Category=Микросхемы, ComponentLink1Description=Datasheet, ComponentLink1URL=http://www.farnell.com/datasheets/2174330.pdf, Logic Function="D-type flip-flop", Manufacturer Part Number=74AUP1G74, Number of Pins=8, Разработчик="Жабин И."
L1 L2 L3 L4: "Ceramic Chip Inductors", Manufacturer=Coilcraft, Category="Катушки индуктивности", ComponentLink1Description=datasheet, ComponentLink1URL=https://www.coilcraft.com/pdfs/0603hp.pdf, ComponentLink2Description=Coilcraft, ComponentLink2URL=https://www.coilcraft.com/0603hp.cfm, Manufacturer Part Number=0603HP-18NXJE, Разработчик="Леткин Д.С."
LG1: "световод на плату под 4 светодиода", Manufacturer=Mentor, Recomended LEDs Case="SMD 0603", Category=Прочее, ComponentLink1Description=Datasheet, ComponentLink1URL=https://www.mentor-bauelemente.de/en/products/product_search/?s=1296.1004&quelle=pds&k=#starts, Manufacturer Part Number=1296.1004, Recomended diameter (front panel)=2mm, Rule="Polygon Connect Style [Style - Relief Connect    Width = 0.25mm    Angle = 90    # Entries = 4    Air Gap = 0.25mm    ]"
R1 R5: library part Resistors, Category=Резисторы
R2 R3 R4: library part 0603R-4K7, "GENERIC RESISTOR 0603", Manufacturer="Stackpole Electronics Inc", Manufacturer Part Number="RMCF 1/16 4.7K 1% R", Supplier Part Number 1=RMCF0603FT4K70TR-ND, Reel=R23, Supplier 1=Digi-Key
R6 R7 R8 R9: library part 0603R-100, "GENERIC RESISTOR 0603", Manufacturer="Stackpole Electronics Inc", Manufacturer Part Number="RMCF 1/16 100 1% R", Supplier Part Number 1=RMCF1/16100FRDKR-ND, Reel=R24, Supplier 1=Digi-Key
R10 R11 R12 R13 R14 R15 R16 R17 R18 R19 R20: library part 0603R-0R, "GENERIC JUMPER 0603", Manufacturer="Stackpole Electronics Inc", Manufacturer Part Number="RMC 1/16 0 G", Supplier Part Number 1=RMCF0603ZT0R00TR-ND, Reel=R26, Supplier 1=Digi-Key
U1: library part LD1117S50TR, Base Part Number=LD1117, Current - Output=800mA, Manufacturer=STMicroelectronics, Operating Temperature="0°C ~ 125°C", Package / Case="TO-261-4, TO-261AA", Supplier Device Package=SOT-223, Supplier Part Number 1=497-6447-1-ND, Voltage - Input (Max)=15V, Voltage - Output (Max)=-, Voltage - Output (Min/Fixed)=5V, Voltage Dropout (Max)="1.2V @ 800mA", Category="Integrated Circuits (ICs)", ComponentLink1Description=http://www.st.com/content/ccc/resource/technical/document/datasheet/99/3b/7d/91/91/51/4b/be/CD00000544.pdf/files/CD00000544.pdf/jcr:content/translations/en.CD00000544.pdf, ComponentLink1URL=http://www.st.com/content/ccc/resource/technical/document/datasheet/99/3b/7d/91/91/51/4b/be/CD00000544.pdf/files/CD00000544.pdf/jcr:content/translations/en.CD00000544.pdf, Control Features=-, Manufacturer Part Number=LD1117S50TR, Mounting Type="Surface Mount", Output Configuration=Positive, Output Type=Fixed, Packaging="Cut Tape (CT)", Part Status=Active, Pricing 1="1=0.51, 10=0.411, 100=0.2802, 500=0.21012, 1000=0.15759 (USD)", Protection Features="Over Current, Over Temperature", PSRR="75dB (120Hz)", RoHS="RoHS Compliant", Stock 1=3876, Supplier 1=Digi-Key
U2: "400 Mbps 5 V PECL to TTL Translator with PECL Input and TTL Output, 1 Tx and 1 Rx, -40 to +85 degC, 8-pin SOIC (D), Green (RoHS & no Sb/Br)", Manufacturer="Texas Instruments", Supplier Part Number 1=296-24661-5-ND, Code_JEDEC=MO-187-AA, ComponentLink1Description=Datasheet, ComponentLink1URL=http://www.ti.com/general/docs/lit/getliterature.tsp?genericPartNumber=SN65ELT21&fileType=pdf, ComponentLink2Description="URL Link1", ComponentLink2URL=SamplesURL:http://www.ti.com/product/sn65elt21#samples, DatasheetVersion=SLLS923, Eco-Plan="Green (RoHS & no Sb/Br)", ICC(Max)(mA)=20, Input Signal=PECL, Mounting Technology="Surface Mount", No. of Rx=1, No. of Tx=1, Output Signal=TTL, PackageDescription="8-Pin Thin Small Outline Package 3 x 3 mm Body ,0.65 mm Pitch", PackageReference=DGK8, PackageVersion="revE, May-2006", PartNumber=SN65ELT21D, Signaling Rate(Mbps)=400, SubFamily="PECL PHY", Supplier 1=Digi-Key, Supplier 2=Farnell, Supplier 3=Newark, Supplier 4=Mouser, Supplier Part Number 2=1779981, Supplier Part Number 3=14R9900, Supplier Part Number 4=595-SN65ELT21D, xECL=TRUE
XP2: "DIN-Signal 2C048MS-1C1-2", Current Rating=-, Manufacturer=HARTING, Manufacturer Part Number=09231486921, Material Flammability Rating="UL94 V-0", Category=Разъёмы, ComponentLink1Description=Datasheet, ComponentLink1URL=https://b2b.harting.com/files/download/PRD/PDF_DS/09031200201_100580147DRW000B.pdf, Connector Type="Header, Male Pins", Contact Finish=-, Contact Finish Thickness=-, Features=-, Function="просто так", HelpURL=https://b2b.harting.com/ebusiness/en_us/DIN-Signal-2C048MS-1C1-2/09231486921, Material - Insulation="Thermoplastic resin, Glass-fibre Filled", Mounting Type="Through Hole, Right Angle", Number of Contacts=48, Number of Positions Loaded=All, Operating Temperature=-, Packaging=Bulk, Packaging size=20, Part Status=Active, Pitch="0.100\" (2.54mm)", RoHS="RoHS Compliant", Style=C, Termination=Solder, Разработчик="Леткин Д."
XW1 XW2: "Telegartner Right Angle 50Ohm Thru Hole SMA Connector,  jack,  Solder Termination", Manufacturer=Telegartner, Supplier Part Number 1=70884022, Category=Разъёмы, ComponentLink1Description=https://www.alliedelec.com/m/d/98f426e0d5bb6ee5532bde4cab502770.pdf, ComponentLink1URL=https://www.alliedelec.com/m/d/98f426e0d5bb6ee5532bde4cab502770.pdf, ComponentLink2Description=https://www.alliedelec.com/-j01151a0201/70884022/, ComponentLink2URL=https://www.alliedelec.com/-j01151a0201/70884022/, Manufacturer Part Number=J01151A0201, Pricing 1="1=11.2500 (USD)", RoHS=No, Stock 1=509, Supplier 1=Allied
ZQ1: "Генераторы кварцевые программируемые", Case/Package="DIL 8", Manufacturer="БМГ ПЛЮС", Category=Фильтры, ComponentLink1Description=datasheet, ComponentLink1URL=http://bmgplus.ru/images/pdf/pdf1010_tcxo.pdf, Manufacturer Part Number=ГК1010-TK, Джиттер, пс=0,8, Нагрузка, пФ=15, Питание,В=3.3, Потребляемый ток, мA=35, Разработчик="Леткин Д.С.", Частота, МГц="10 - 250"

## Via types
v1: diameter 0.6, hole 0.3, Top to Bottom, tented both sides, 268 vias
v2: diameter 0.5, hole 0.3, Top to Bottom, tented both sides, 26 vias
v3: diameter 0.8, hole 0.4, Top to Bottom, tented both sides, 1 vias

## Nets (pads, with @x,y where several pads share a name; then routed paths per layer and width w, separated by ;. In a path a pad name is that pad's centre, name@x,y a point inside that pad or via, vN(x,y) a via of type N, cw(c..) or ccw(c..) an arc to the next point about the centre after c; other vN are vias at no path point)
+3.3V: C8.1 C9.2 C10.1 C11.2 C12.1 C13.2 C14.1 C15.2 C16.1 C17.2 C20.1 C21.2 C22.2 C24.2 C29.1 C30.2 C31.2 C32.1 C44.1 DD1.4 DD1.6 DD1.10 DD1.16 DD1.17 DD1.26 DD1.28 DD1.32 DD7.6 DD7.7 DD7.8 L1.2 L3.2 L4.2 R13.2 U1.2 ZQ1.2 ZQ1.6 | length 64.1
  Top w0.125: v1@38.808,53.015 v1(38.82,53.003) ; C12.1 C12.1@44.12,43.957
  Top w0.25: 33.664,49.593 34.675,48.582 DD1.10 ; C16.1 37.058,51.593 37.433,51.218 DD1.6 ; DD1.4 38.433,50.862 39.837,52.266 39.837,52.289 v1(40.587,53.039) ; DD1.26 41.219,46.082 41.587,45.715 41.743,45.715 ; DD1.28 43.157,47.082 43.255,47.18 44.201,47.18 44.579,46.801 44.579,46.31 45.487,45.402 ZQ1.6 ; DD1.32 40.957,49.082 40.957,49.364 41.43,49.837
  Top w0.3: C11.2@30.29,52.969 32.098,52.969 C10.1@32.126,52.997 ; v1(32.141,53.012) C10.1@32.126,52.997 ; 33.664,49.593 32.126,51.13 C10.1@32.126,52.997 ; C16.1 C17.2 v1@38.808,53.015 ; 41.43,49.837 42.481,50.888 C9.2 v1(45.919,50.888) C8.1@45.919,50.924 ; C13.2@42.048,45.86 C13.2
  Top w0.35: C13.2@42.193,45.765 42.325,45.633 43.168,45.633 43.895,44.907 C12.1
  Top w0.4: DD7.8 DD7.7 19.789,17.145 ; 35.683,44.895 35.683,45.457 ; 35.733,44.832 36.308,44.832
  Top w0.5: v1(19.789,15.106) DD7.8 ; v1(34.161,40.897) 34.161,42.217 35.733,43.788 35.733,44.832 35.733,44.895 ; v1@34.18,40.878 34.18,39.878 C14.1 C15.2 ; C12.1 C22.2@45.462,44.182 ; C22.2 45.687,45.252 ZQ1.6@45.837,45.402 ; ZQ1.6 ZQ1.6@45.837,45.402 ; ZQ1.2 47.637,46.682 47.537,46.582 46.931,46.582 46.037,45.689 46.037,45.552 45.887,45.402 ZQ1.6@45.837,45.402
  Bottom w0.5: C30.2 C29.1 26.896,41.637 26.896,41.692 v1(26.915,41.711) ; C31.2 C32.1 v1(30.268,38.29) ; v1(28.92,44.569) 28.939,44.589 29.244,44.589 29.873,45.217 C20.1 C21.2
  other v1: 34.161,32.793 42.153,45.697 42.84,71.052 44.24,71.052 45.64,71.052 49.84,71.052 43.54,72.452 44.94,72.452 46.34,72.452 47.74,72.452 49.14,72.452 50.54,72.452 42.84,73.852 44.24,73.852 45.64,73.852 47.04,73.852 48.44,73.852 49.84,73.852 51.24,73.852 43.54,75.252 44.94,75.252 46.34,75.252 51.94,75.252
+5V: C37.2 C38.2 C41.2 C43.1 DA1.3 DD4.16 U2.8 | length 6.2
  Top w0.25: DD4.16 30.291,33.182 30.759,33.65 v1(30.778,33.65)
  Top w0.45: U2.8@26.945,24.126 26.945,24.02 v1(29.486,24.02)
+6V: C23.2 C42.2 C45.1 C46.1 C47.1 C48.1 DA1.1 DD5.5 DD6.5 DD8.5 DD9.5 R6.2 R17.2 U1.3 XP2.a1 XP2.b1 XP2.c1 | length 105.7
  Top w0.6: v3@23.894,55.561 v3(23.894,55.588) ; v1(26.29,16.17) DD6.5
  Top w0.8: R6.2@19.797,54.232 22.565,54.232 v3@23.894,55.561
  Bottom w0.5: R17.2 5.539,69.999 12.904,69.999 14.978,67.925 29.821,67.925
  Bottom w0.6: v1(15.238,16.827) 20.323,16.827 20.98,16.17 v1(26.29,16.17) 28.078,16.17 29.058,17.15 29.058,19.331 28.233,20.156 v1(27.24,20.156)
  Bottom w0.8: v1(15.238,16.827) 15.238,46.932 v3(23.894,55.588) 26.119,55.588 31.026,60.495
  other v1: 15.238,21.06 34.348,67.552 35.748,67.552 37.148,67.552 38.548,67.552 33.648,68.952 35.048,68.952 36.448,68.952 37.848,68.952 34.348,70.352 37.148,70.352 33.648,71.752
CLK: DD1.1 DD4.8 XP2.a15 | length 96.7
  Top w0.25: v1(19.5,28.143) 19.514,28.157 19.514,30.687 20.509,31.682 DD4.8 ; DD1.1 39.933,50.253 40.47,50.79 41.419,50.79 42.445,51.816 42.445,52.262 v1(42.512,52.329)
  Bottom w0.25: v1(19.5,28.143) 20.227,28.143 22.718,25.652 48.407,25.652 51.78,22.278 56.395,22.278 XP2.a15 60.147,26.03 60.147,45.6 57.965,47.782 48.205,47.782 46.08,49.907 44.934,49.907 v1(42.512,52.329)
CS: DD4.9 XP2.a11 | length 40.8
  Top w0.25: v1(24.16,29.587) 24.177,29.587 25.188,30.599 25.188,30.623 25.219,30.653 DD4.9@25.219,30.954
  Bottom w0.25: v1(24.16,29.587) 26.745,27.002 50.112,27.002 50.986,27.876 50.986,29.01 51.769,29.793 55.597,29.793 56.282,30.478 56.282,32.325 XP2.a11
DATA: DD1.2 DD4.7 XP2.a13 | length 86.3
  Top w0.25: v1(19.231,31.643) 19.77,32.182 DD4.7 ; DD1.2 39.433,50.389 40.292,51.248 40.974,51.248 v1(41.599,51.873)
  Bottom w0.25: v1(19.231,31.643) 19.231,30.412 23.091,26.552 50.299,26.552 51.076,27.329 56.366,27.329 XP2.a13 59.247,30.21 59.247,41.349 58.095,42.5 50.972,42.5 v1(41.599,51.873)
DIV_N: DD4.10 U2.3 | length 2.5
  Top w0.26: U2.3 25.676,28.519 25.676,29.128 25.716,29.168 DD4.10
DIV_P: DD4.11 U2.2 | length 2.5
  Top w0.26: DD4.11 26.216,29.166 26.254,29.128 26.254,28.519 U2.2
GND: C2.2 C3.2 C4.2 C5.2 C6.2 C7.2 C8.2 C9.1 C10.2 C11.1 C12.2 C13.1 C14.2 C15.1 C16.2 C17.1 C19.1 C20.2 C21.1 C22.1 C23.1 C24.1 C27.2 C28.2 C29.2 C30.1 C31.1 C32.2 C36.2 C37.1 C38.1 C39.1 C40.1 C41.1 C42.1 C43.2 C44.2 C45.2 C46.2 C47.2 C48.2 DA1.2 DD1.8 DD1.9 DD1.11 DD1.18 DD1.21 DD1.27 DD1.31 DD1.33 DD2.5 DD2.6 DD3.2 DD3.4 DD4.17 DD5.1 DD5.3 DD6.1 DD6.3 DD7.4 DD8.1 DD8.3 DD9.1 DD9.3 LG1.2 LG1.4 LG1.6 LG1.8 R2.1 R5.2 R8.1 R9.2 R10.1 R11.1 R12.1 R15.1 U1.1 U2.5 XP2.a2 XP2.a4 XP2.a5 XP2.a16 XP2.b2 XP2.b4 XP2.b5 XP2.c2 XP2.c4 XP2.c5 XP2.MH XW1.2 XW2.2 ZQ1.3 | length 2.5
  Top w0.25: 41.083,46.582 41.497,46.582 41.622,46.457 43.465,46.457 v1(43.509,46.414)
  other v1: 4.64,4.252 9.64,4.252 14.64,4.252 19.64,4.252 24.64,4.252 29.64,4.252 34.64,4.252 39.64,4.252 44.64,4.252 49.64,4.252 54.64,4.252 44.64,9.17 49.64,9.17 7.14,9.252 9.64,9.252 12.14,9.252 14.678,9.252 17.14,9.252 19.636,9.252 22.14,9.252 24.67,9.252 27.14,9.252 29.74,9.252 32.14,9.252 34.64,9.252 37.14,9.252 39.64,9.252 42.14,9.252 47.14,9.252 52.14,9.252 57.14,9.252 62.14,9.252 9.64,10.478 51.535,11 9.64,12.515 51.535,13.017 4.64,14.252 9.64,14.252 14.64,14.252 24.64,14.252 29.64,14.252 34.64,14.252 39.64,14.252 44.64,14.252 49.64,14.252 54.64,14.252 51.535,15.348 9.64,16.44 5.076,16.894 51.535,17.745 6.781,17.939 8.781,17.939 10.781,17.939 12.781,17.939 17.14,19.252 22.14,19.252 32.14,19.252 37.14,19.252 42.14,19.252 57.14,19.252 62.14,19.252 2.872,19.497 8.264,19.58 10.264,19.58 12.264,19.58 4.492,20.669 9.64,20.845 9.64,22.588 4.64,24.252 9.64,24.252 19.64,24.252 34.64,24.252 39.64,24.252 59.64,24.252 9.64,26.251 9.64,28.121 7.14,29.252 12.14,29.252 17.14,29.252 22.14,29.252 37.14,29.252 42.14,29.252 47.14,29.252 62.14,29.252 9.64,30.443 9.64,32.559 4.64,34.252 9.64,34.252 19.64,34.252 29.64,34.252 34.64,34.252 49.64,34.252 24.963,36.054 26.846,36.247 9.64,36.449 27.135,37.141 24.909,37.635 27.754,38.003 31.749,38.247 9.64,38.907 25.97,38.907 7.14,39.252 12.14,39.252 17.14,39.252 22.14,39.252 47.14,39.252 62.14,39.252 27.1,39.929 32.01,39.927 31.536,41.559 9.64,41.722 29.677,42.607 32.739,42.761 30.928,43.772 27.902,43.894 33.941,43.963 4.64,44.252 9.64,44.252 19.64,44.252 34.64,44.252 4.108,44.949 32.141,45.022 17.867,45.528 26.942,45.592 19.046,45.7 16.713,45.817 20.731,45.922 25.275,45.922 7.324,45.969 9.024,45.969 10.724,45.969 12.424,45.969 14.124,45.969 22.431,45.96 2.853,46.096 33.34,46.332 24.203,47.242 7.662,47.611 9.362,47.611 11.062,47.611 12.762,47.611 14.41,47.656 22.426,47.66 25.841,47.696 20.749,47.939 27.902,48.164 32.332,48.571 4.441,48.692 12.14,49.252 27.14,49.252 42.14,49.252 62.14,49.252 20.386,49.6 9.64,50.583 4.64,54.252 9.64,54.252 14.64,54.252 24.64,54.252 44.64,54.252 59.64,54.252 9.64,56.948 7.14,59.252 12.14,59.252 17.14,59.252 22.14,59.252 27.14,59.252 62.14,59.252 9.64,59.589 9.64,61.508 11.75,61.616 14.124,61.616 16.648,61.616 19.066,61.616 21.795,61.616 24.169,61.616 26.693,61.616 29.312,61.616 31.744,61.616 34.118,61.616 36.642,61.616 39.06,61.616 41.497,61.616 43.871,61.616 46.287,61.616 14.64,64.252 19.64,64.252 49.64,64.252 47.342,67.072 42.14,69.252 57.14,69.252 62.14,69.252 4.64,74.252 9.64,74.252 39.64,74.252 54.64,74.252
  other v2: 22.37,43.38 23.132,43.38 23.894,43.38 24.656,43.38 21.989,44.142 22.751,44.142 23.513,44.142 24.275,44.142 25.037,44.142 22.37,44.904 23.132,44.904 23.894,44.904 24.656,44.904 22.37,48.714 23.132,48.714 23.894,48.714 24.656,48.714 21.989,49.476 22.751,49.476 23.513,49.476 24.275,49.476 25.037,49.476 22.37,50.238 23.132,50.238 23.894,50.238 24.656,50.238
LD: DD1.25 XP2.b16 | length 37.9
  Top w0.25: DD1.25 41.083,45.582 41.368,45.297 41.368,42.546 44.345,39.57 44.345,21.593 v1(45.737,20.2)
  Bottom w0.25: v1(45.737,20.2) 45.832,20.2 46.532,19.5 53.617,19.5 XP2.b16
LE: DD1.3 XP2.a12 | length 35.5
  Top w0.25: DD1.3 38.933,50.657 40.083,51.806 40.394,51.806 v1(40.461,51.873)
  Bottom w0.25: v1(40.461,51.873) 40.527,51.807 50.985,41.349 50.972,41.335 50.972,40.447 51.419,40 57.911,40 58.797,39.114 58.797,32.3 XP2.a12
LED_1: R20.2 XP2.c6 | length 64.7
  Top w0.25: v1(21.431,63.472) 21.431,63.567 22.582,64.718 23.431,64.718 23.825,64.324 42.42,64.324 v1(43.39,65.294)
  Power w0.25: v1(43.39,65.294) 47.149,65.294 50.257,62.187 50.257,48.62 XP2.c6
  Bottom w0.25: R20.2 9.278,67.042 10.488,68.252 12.212,68.252 14.264,66.2 20.587,66.2 21.431,65.356 v1(21.431,63.472)
LED_2: R19.2 XP2.c8 | length 72.1
  Top w0.25: v1(22.231,63.472) 22.856,64.097 23.416,64.097 23.639,63.874 42.606,63.874 43.117,64.386 43.365,64.386 v1(43.432,64.453)
  Power w0.25: v1(43.432,64.453) 43.474,64.494 47.313,64.494 49.807,62.001 49.807,43.99 XP2.c8
  Bottom w0.25: R19.2 6.738,68.103 7.359,68.724 12.376,68.724 14.45,66.65 20.937,66.65 22.231,65.356 v1(22.231,63.472)
LED_3: R18.2 XP2.c10 | length 78.4
  Top w0.25: v1(23.132,63.472) 23.181,63.424 43.063,63.424 43.293,63.654 v1(43.388,63.654)
  Power w0.25: v1(43.388,63.654) 43.428,63.694 47.477,63.694 49.357,61.814 49.357,39.36 XP2.c10
  Bottom w0.25: R18.2 4.198,67.288 6.084,69.174 12.562,69.174 14.636,67.1 21.388,67.1 23.132,65.356 v1(23.132,63.472)
NetC1_2: C1.2 DD1.29 | length 2.2
  Top w0.25: DD1.29 41.46,47.582 41.778,47.9 C1.2
NetC2_1: C2.1 C3.1 DD1.19 | length 4.7
  Top w0.25: C3.1 C2.1 37.058,43.531 37.433,43.906 DD1.19
NetC4_1: C4.1 C5.1 DD1.23 | length 10.5
  Top w0.25: C4.1 C5.1 39.433,39.253 39.74,39.561 39.74,42.369 ; DD1.23@39.434,44.582 39.434,42.696 39.761,42.369
NetC6_1: C6.1 C7.1 DD1.24 | length 8.2
  Top w0.25: DD1.24@39.933,44.982 DD1.24 39.933,44.459 40.618,43.774
  Top w0.3: C6.1@40.597,39.043 C6.1@40.618,39.043 ; 40.618,43.774 C6.1@40.618,39.043 ; C7.1@42.576,39.043 C7.1 C6.1 C6.1@40.618,39.043
NetC18_1: C18.1 DD1.7 R3.1 | length 4.6
  Top w0.3: R3.1 35.412,51.682 C18.1 ; C18.1@35.461,51.743 35.523,51.681 36.185,51.681 36.928,50.938 36.928,49.837 DD1.7
NetC18_2: C18.2 R4.1 | length 0.9
  Top w0.4: C18.2@35.461,53.086 R4.1@35.461,54.022
NetC19_2: C19.2 DD1.20 R3.2 | length 15.6
  Top w0.25: v1(37.808,43.397) 37.808,43.492 37.933,43.617 DD1.20
  Top w0.3: v1(33.759,54.355) 33.785,54.33 R3.2@33.785,53.102
  Bottom w0.25: v1(33.759,54.355) 35.099,53.015 35.099,45.679 37.367,43.411 37.794,43.411 v1(37.808,43.397)
NetC25_1: C25.1 DD2.1 | length 1.7
  Top w0.41: C25.1 DD2.1@30.592,46.843
NetC25_2: C25.2 DD3.1 | length 1.9
  Top w0.41: DD3.1 C25.2@27.409,46.809
NetC26_1: C26.1 DD3.3 L2.1 | length 3.1
  Top w0.125: L2.1 L2.1
  Top w0.41: C26.1 L2.1 ; 20.14,46.809 DD3.3
NetC26_2: C26.2 R7.1 R8.2 | length 2.8
  Top w0.125: C26.2@18.388,46.809 C26.2
  Top w0.41: R8.2 R7.1 C26.2@18.388,46.809
NetC27_1: C27.1 C28.1 L2.2 R6.1 | length 5.6
  Top w0.4: R6.1 18.388,54.225 18.388,52.537 18.395,52.53 C27.1@18.405,52.541 ; C28.1 C27.1@18.405,52.541 ; C27.1@18.405,52.555 C27.1@18.405,52.541
  Top w0.6: L2.2@18.405,48.695 C28.1
NetC35_1: C35.1 C39.2 C40.2 DD4.12 | length 6.2
  Top w0.25: DD4.12 26.716,30.665 27.334,30.046 C39.2 C40.2 C35.1
NetC35_2: C35.2 DD4.14 | length 5.6
  Top w0.25: DD4.14 31.912,32.182 32.244,31.85 32.244,31.334 C35.2
NetC36_1: C36.1 DD4.15 | length 5.3
  Top w0.25: DD4.15 C36.1@32.782,32.682
NetDD1_5: DD1.5 R1.2 | length 6.3
  Top w0.25: DD1.5 37.933,51.231 39.387,52.686 39.387,52.694 39.829,53.136 39.829,54.071 40.287,54.529 R1.2
NetDD1_22: DD1.22 R2.2 | length 3.2
  Top w0.25: R2.2 DD1.22
NetDD2_2: DD2.2 L1.1 | length 1.5
  Top w0.25: v1@31.253,45.402 DD2.2@31.253,46.831
  Top w0.26: DD2.2 DD2.2@31.253,46.831 ; v1@31.253,45.402 v1(31.273,45.382)
NetDD4_1: DD4.1 R10.2 | length 2.3
  Top w0.25: DD4.1 26.716,34.63 27.358,35.272 27.647,35.272 R10.2
NetDD4_4: DD4.4 R11.2 | length 3.7
  Top w0.26: R11.2 24.45,35.154 25.207,34.397 25.207,33.916 DD4.4
NetDD4_5: DD4.5 R12.2 | length 2.5
  Top w0.26: R12.2 22.874,33.182 DD4.5
NetDD4_13: DD4.13 R13.1 R14.1 R15.2 | length 8.2
  Top w0.26: DD4.13 29.721,31.682 29.874,31.53 v1(29.966,31.53)
  Bottom w0.26: v1(29.966,31.53) 30.014,31.481 32.715,31.481 R14.1 ; R15.2 R14.1 ; R13.1 R14.1
NetDD5_2: DD5.2 U2.7 | length 1.5
  Top w0.41: DD5.2 U2.7
NetDD5_4: DD5.4 DD6.2 | length 1.2
  Top w0.45: DD6.2 DD5.4
NetDD6_4: DD6.4 DD7.1 | length 1.4
  Top w0.3: DD7.1@23.013,16.286 23.626,16.286 23.65,16.262
  Top w0.41: 23.65,16.262 DD6.4
NetDD7_2: DD7.2 DD7.3 | length 0.2
  Top w0.3: 22.989,16.975 22.989,17.145
NetDD7_5: DD7.5 DD8.2 DD9.2 | length 7.5
  Top w0.33: 19.125,17.81 DD7.5
  Top w0.41: DD8.2@17.432,17.81 19.125,17.81 19.125,21.51 18.625,22.01 DD9.2
NetDD8_4: DD8.4 R16.2 XW2.1 | length 11.5
  Top w0.41: XW2.1 13.912,18.76 ; R16.2 13.912,18.76 ; DD8.4@14.732,18.76 13.912,18.76
NetDD9_4: DD9.4 R16.1 | length 1.7
  Top w0.41: R16.1@13.912,21.655 13.941,21.655 14.015,21.729 14.015,22.262 DD9.4@14.732,22.979
NetLG1_1: LG1.1 R17.1
  other v1: 1.658,64.721
NetLG1_3: LG1.3 R18.1 | length 0
  Bottom w0.25: v1(4.198,64.718) R18.1
NetLG1_5: LG1.5 R19.1 | length 0
  other v1: 6.738,64.726
NetLG1_7: LG1.7 R20.1 | length 0
  Bottom w0.25: v1(9.278,64.721) R20.1
NetR7_2: R7.2 R9.1 XW1.1 | length 12.2
  Top w0.41: XW1.1 15.492,46.79 R7.2 R9.1
REF_IN: C1.1 ZQ1.4 | length 1.1
  Top w0.41: C1.1@43.902,48.012 45.013,48.012
RFOutA_N: DD1.13 DD2.3 | length 3.6
  Top w0.26: DD2.3@31.968,46.837 31.968,46.886 32.02,46.886 32.221,47.087 DD1.13@35.413,47.087
RFOutA_P: DD1.12 DD2.4 | length 3.8
  Top w0.26: DD2.4@31.968,47.827 31.968,47.806 31.993,47.806 32.216,47.582 DD1.12
RFOutB1_N: C34.2 DD4.2 | length 7.5
  Top w0.26: DD4.2 26.216,37.392 28.396,39.572 C34.2
RFOutB1_P: C33.2 DD4.3 | length 7.8
  Top w0.26: DD4.3 25.716,37.599 28.153,40.036 C33.2
RFOutB_N: C34.1 DD1.15 L4.1 | length 10.2
  Top w0.26: L4.1 31.109,39.324 30.154,40.279 C34.1 30.003,41.09 34.995,46.082 DD1.15
RFOutB_P: C33.1 DD1.14 L3.1 | length 10.6
  Top w0.26: L3.1 27.905,42.543 28.86,41.589 C33.1 29.638,41.431 34.788,46.582 DD1.14
SPI_MISO: DD1.30 DD4.6 XP2.a14 | length 90.6
  Top w0.25: v1(18.328,32.182) 18.805,32.659 24.137,32.659 24.149,32.671 24.48,32.671 DD4.6 ; DD1.30 41.323,48.082 41.826,48.585 42.965,48.585 43.575,49.195 v1(45.489,49.195)
  Bottom w0.25: v1(18.328,32.182) 18.328,30.679 22.905,26.102 50.183,26.102 51.535,24.75 56.327,24.75 XP2.a14 59.697,28.12 59.697,44.036 58.659,45.073 49.611,45.073 v1(45.489,49.195)
SW: R1.1 R4.2 R5.1 | length 7.2
  Top w0.4: R4.2@35.521,55.726 36.099,56.304 40.569,56.304 40.769,56.104 40.819,56.104 40.894,56.029 R1.1 R5.1
SYNC: R14.2 XP2.a10 | length 25.5